# EAGLE board SPhotoDiode (EAGLE 8.6.0)
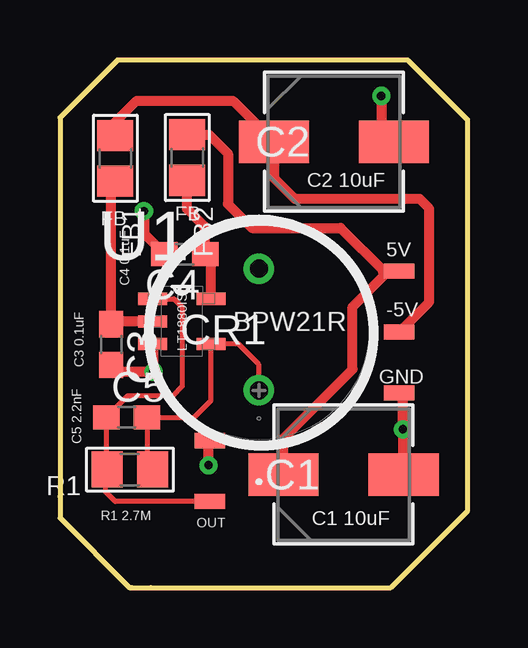
[diagram p0: board, top side]
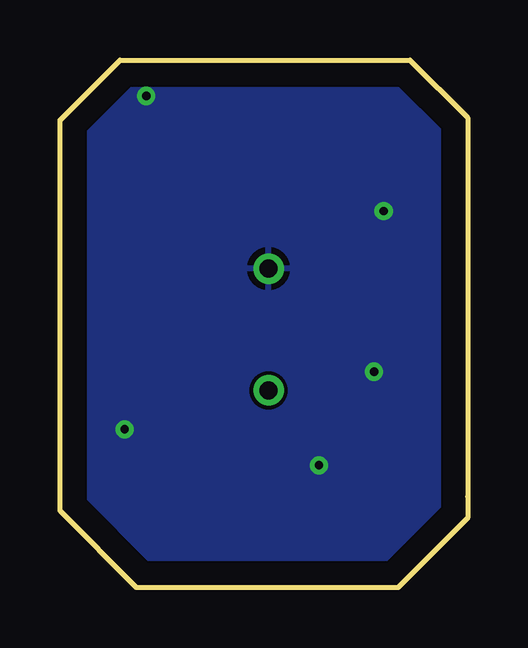
[diagram p1: board, bottom side, seen from below]

Size 17 x 22 mm. Coordinates in mm from the lower left corner, seen from the top.
Outline: 3.8,0 13.8,0 17,3.2 17,19.5 14.5,22 2.4,22 0,19.6 0,3.8 0,2.9 2.9,0 3,0 3.8,0
Copper layers (1*16): Top 0.035mm / dielectric 1.5mm / Bottom 0.035mm
Design rules "default": minimum track width 6mil, minimum drill 0.35mm, track to track 6mil, track to pad 6mil, pad to pad 6mil, via to via 6mil, smd to smd 6mil, copper to edge 40mil, drill to drill 6mil, minimum pad ring 10mil, minimum via ring 8mil, stop-mask expansion 4mil, vias tented up to drill 0mil, thermal gap 10mil

## Footprints (pad centres in the part's own frame; a part is rotated, then mirrored left to right if it is on the bottom)
CAP_EEFC_C = smd 2.921 x 1.778: 1 -2.502,0; 2 2.502,0
C0603 = smd 1.1 x 1: 1 -0.85,0; 2 0.85,0
TO99_BPW20RF = drill 0.762 pad 1.27: 1 0,-5.08; 2 0,0
0805 = smd 1.3 x 1.5: 1 -0.95,0; 2 0.95,0
22-28-8020 = smd 0.635 x 1.27: 1 1.27,0; 2 -1.27,0
SOT95P280X100-5N = smd 1.219 x 0.508: 1 -1.219,0.94; 2 -1.219,0; 3 -1.219,-0.94; 4 1.219,-0.94; 5 1.219,0.94
PINHD_SMD-3 = smd 0.635 x 1.27: 1 -2.54,0; 2 0,0; 3 2.54,0

## Placement (x,y rotation side)
C1  EEEFC1V100R  [CAP_EEFC_C]  11.83,4.71 0 top
C2  EEEFC1V100R  [CAP_EEFC_C]  11.43,18.59 0 top
C3  0.1uF  [C0603]  2.14,10.13 270 top
C4  0.1uF  [C0603]  5.21,13.91 180 top
C5  2.2nF  [C0603]  2.78,7.1 0 top
CR1  BPW21R  [TO99_BPW20RF]  8.3,13.3 0 top
FB1  MMZ2012Y152B  [0805]  2.31,17.9 270 top
FB2  MMZ2012Y152B  [0805]  5.31,17.93 270 top
J2  22-28-8020  [22-28-8020]  6.25,4.86 270 top
R1  2.7M  [0805]  2.92,4.92 180 top
U1  LT1880IS5TRMPBF  [SOT95P280X100-5N]  5.08,11.1 0 top
U$2  PINHD_SMD-3  [PINHD_SMD-3]  14.15,10.66 270 top

## Library data of the parts
C1 C2 = 10uFElectrolyticSMD; MANUFACTURER_PART_NUMBER: EEEFC1V100R; VENDOR: Panasonic
C3-C5 = rcl; SPICEPREFIX: C
CR1 = BPW21R; MANUFACTURER_PART_NUMBER: BPW21R; VENDOR: Vishay
FB1 FB2 R1 = microbuilder
J2 = PinHD-2; MANUFACTURER_PART_NUMBER: 22288020; VENDOR: Molex Connector Corporation
U1 = LT1880IS5; DESCRIPTION: Ic Opamp Pico/In Rr/Out Tsot23-5 - Lt1880is5#Trmpbf; DIGI-KEY_PART_NUMBER: LT1880IS5#TRMPBFCT-ND; DIGI-KEY_PURCHASE_URL: https://www.digikey.com/product-detail/en/linear-technology-analog-devices/LT1880IS5-TRMPBF/LT1880IS5-TRMPBFCT-ND/890504?WT.z_cid=ref_snapeda&utm_source=snapeda&utm_medium=aggregator&utm_campaign=buynow; MF: Linear Technology; MP: LT1880IS5#TRMPBF; PACKAGE: TSOT-23 Linear Technology
U$2 = PINHD_SMD-3

## Nets
5V: C1.1 FB2.1 U$2.1
-5V: C2.1 FB1.1 U$2.2
GND_ANALOG: C1.2 C2.2 C3.2 C4.2 CR1.2 J2.2 U1.3 U$2.3
N$14: C5.1 J2.1 R1.2 U1.1
N$17: C5.2 CR1.1 R1.1 U1.4
V+(5V): C4.1 FB2.2 U1.5
V-(-5V): C3.1 FB1.2 U1.2

## Tracks (layer width: path | path; a pad name or v marks a point on that pad's centre or on a via)
5V
  Top 0.406: 13.5,13.2 11.7,15 8,15 7,16 7,18.1 6.22,18.88 FB2.1 | C1.1 9.33,6.23 12.2,9.1 12.2,11.7 13.7,13.2
  Top 0.508: 13.5,13.2 13.7,13.2 U$2.1
-5V
  Top 0.406: U$2.2 15.4,11.91 15.4,15.8 15,16.2 9.8,16.2 8.93,17.07 C2.1 7.22,20.3 3.2,20.3 2.31,19.41 FB1.1
GND_ANALOG  (via drill 0.35)
  Top 0.152: 14.3,7.97 U$2.3 | 14.3,4.74 C1.2
  Top 0.406: 14.4,18.8 14.3,18.3 14.19,18.59 C2.2 13.4,19.12 v13.4,20.5 | v3.5,15.7 3.5,14.77 C4.2 | 14.3,7.97 v14.3,6.6 14.3,4.74 | U1.3 3.9,10.12 v3.9,9 2.42,9 C3.2 | v6.2,5.1 6.2,6.08 J2.2
  pour Bottom: 2.4,22 14.5,22 17,19.5 17,3.2 13.8,0 2.9,0 2.6,0.3 0,2.9 0,3.6 0,19.6
N$14
  Top 0.152: 1.9,4.85 R1.2
  Top 0.203: J2.1 2.31,3.59 1.9,4 1.9,4.85 | U1.1 4.76,12.04 5.1,11.7 5.1,8.4 4.7,8 2.83,8 C5.1 1.93,4.96 R1.2
N$17
  Top 0.2: U1.4 6.36,10.16 6.3,10.1 | 3.63,5.16 R1.1
  Top 0.203: 6.3,10.1 6.3,7.8 5.6,7.1 C5.2 3.63,5.16 | CR1.1 8.3,9.3 7.44,10.16 6.36,10.16
V+(5V)
  Top 0.406: U1.5 6.3,13.67 C4.1 6.06,15.04 5.3,15.8 FB2.2
V-(-5V)
  Top 0.2: 4.24,10.98 U1.2
  Top 0.406: C3.1 2.14,16.78 FB1.2 | U1.2 2.26,11.1
  Top 0.508: 2.26,11.1 C3.1

## Text on the board
tPlace: C2 10uF | FB | FB | 5V | C4 0.1uF | BPW21R | -5V | LT1880IS5 | C3 0.1uF | GND | C5 2.2nF | R1 2.7M | OUT | C1 10uF